# Altium PCB PCB1_邮票孔.PcbDoc
Units mil, origin at the board's own origin, x right, y up, seen from the top; angles counter-clockwise.
Board outline 1760.63 x 866.14 mil, 2 copper layers (Top Layer, Bottom Layer); 12 components, 8 nets, 39 pads, 36 vias.
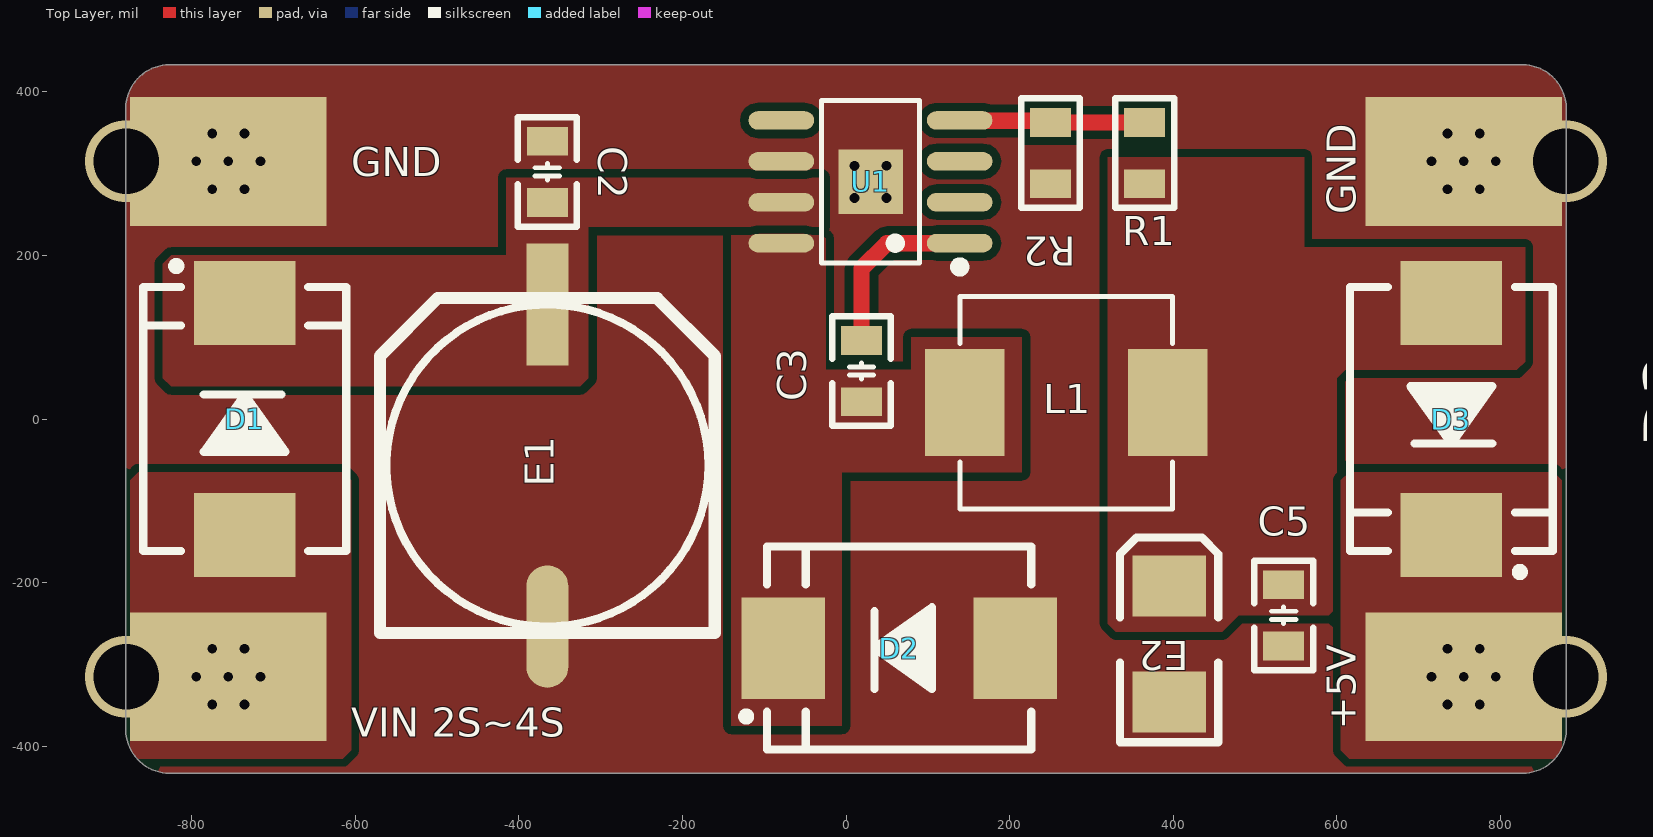
[diagram p0: Top Layer view]
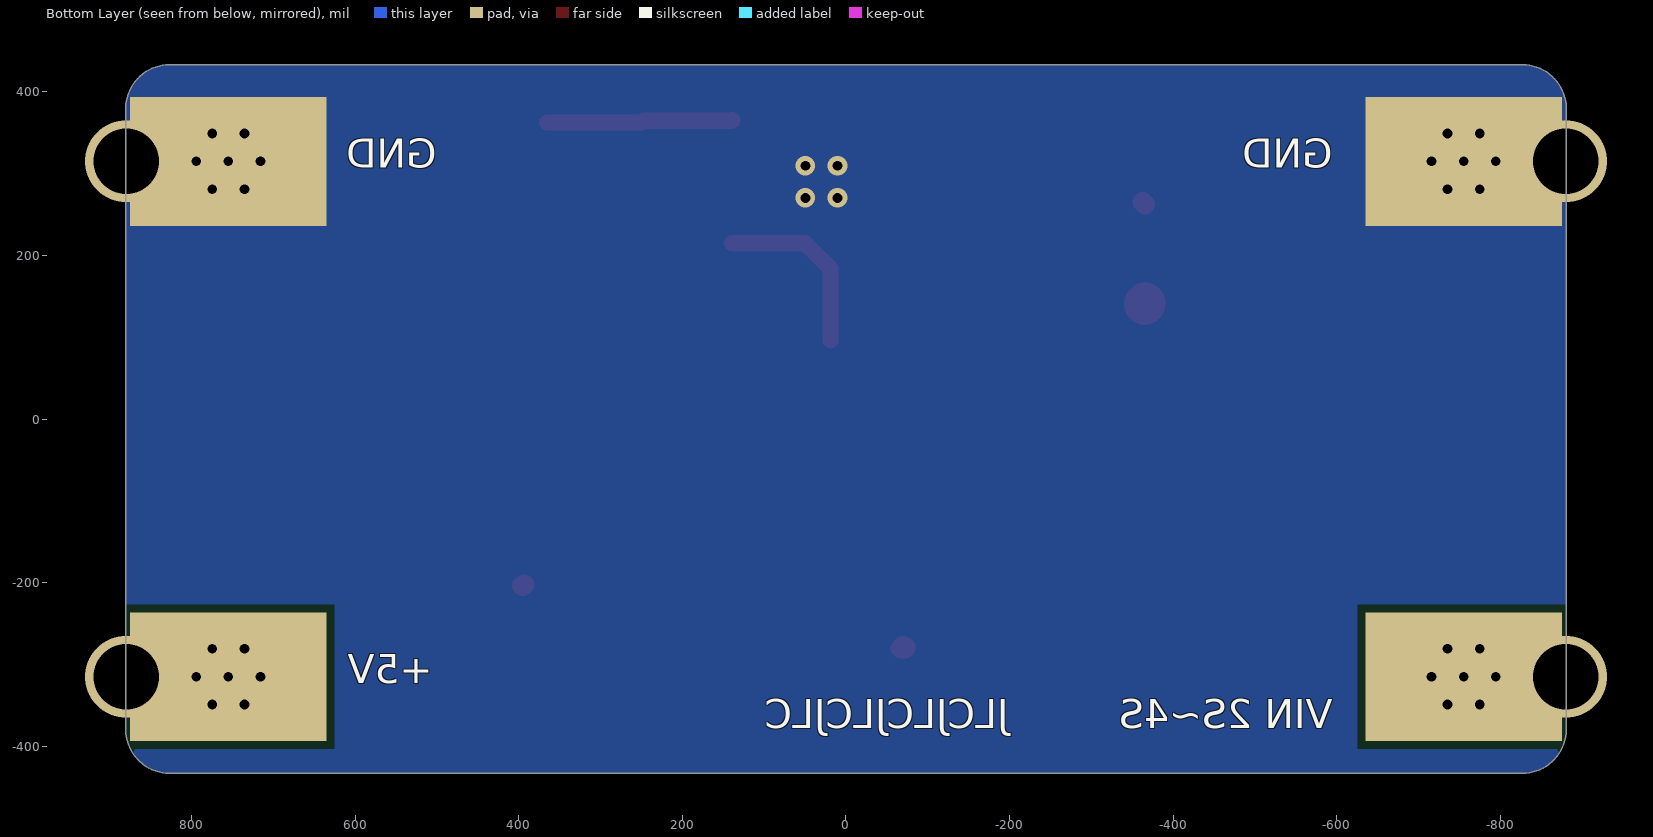
[diagram p1: Bottom Layer view, seen from below]
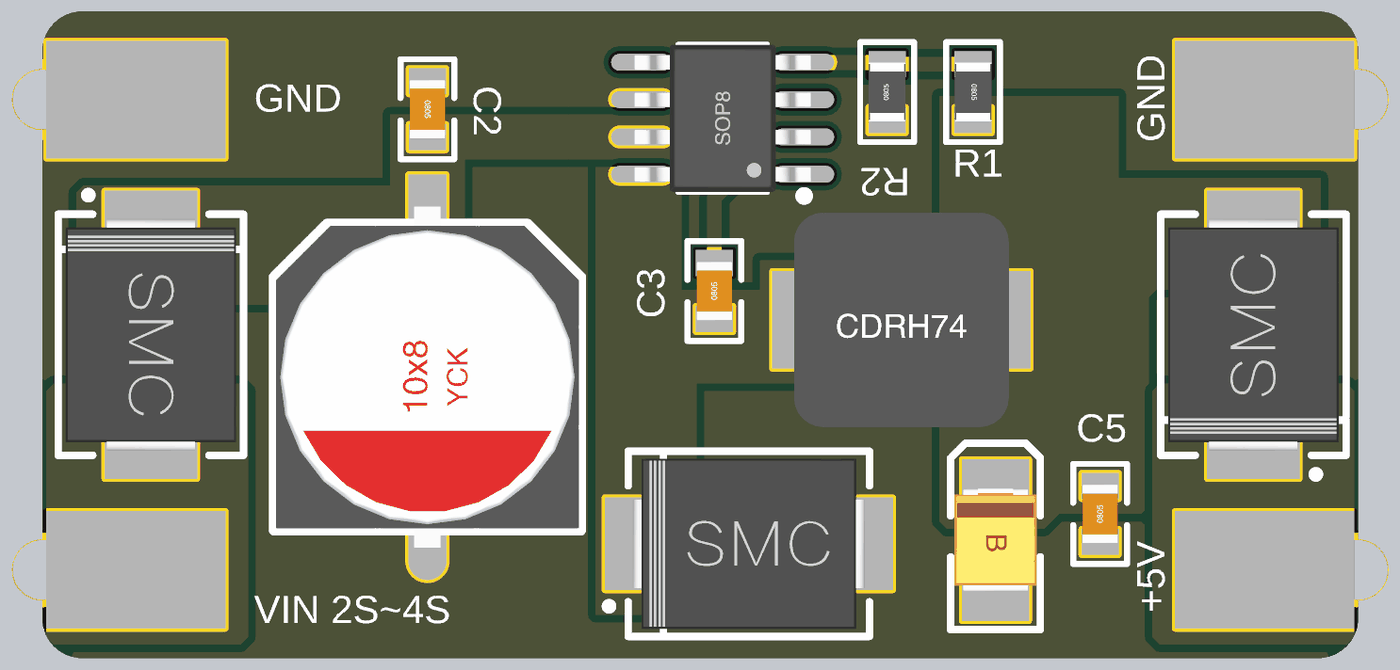
[diagram p2: 3D render of the assembled board from above, using the file's embedded part models]

## Layer stack, top to bottom
Top Solder: solder mask 0.4, Solder Resist, Dk 3.5
Top Layer: signal copper 1.4
Dielectric 1: dielectric 12.6, FR-4, Dk 4.8
Bottom Layer: signal copper 1.4
Bottom Solder: solder mask 0.4, Solder Resist, Dk 3.5

## Board outline
-880.32,-379.53 ccw(c-826.77,-379.53) -826.77,-433.07 826.77,-433.07 ccw(c826.77,-379.53) 880.31,-379.53 880.31,379.53 ccw(c826.77,379.53) 826.77,433.07 -826.77,433.07 ccw(c-826.77,379.53) -880.32,379.53

## Design rules (kind name [scope] priority, off if disabled: settings)
Clearance [All] p1: gap=10 ignorepadtopadclearanceinfootprint=FALSE except(0: Arc-Hole Track-Hole SMDPad-Hole THPad-Hole Via-Hole Fill-Hole Poly-Hole Region-Hole Text-Hole)
MinimumSolderMaskSliver [All] p1: minsoldermaskwidth=0
PolygonConnect [All] p1: connectstyle=Direct reliefconductorwidth=10 reliefentries=4 polygonreliefangle="90 Angle" airgapwidth=10
RoutingVias [All] p1: holewidth=28 width=50 viastyle="Through Hole" minholewidth=28 minwidth=50 maxholewidth=28 maxwidth=50
SilkToSilkClearance [All] p1: silktosilkclearance=0
SilkToSolderMaskClearance [IsPad] p1: minsilkscreentomaskgap=0 clearancetoexposedcopper=TRUE
SolderMaskExpansion [All] p1: expansion=4 istentingtop=FALSE
Width [All] p1: maxlimit=50 minlimit=10 preferedwidth=10
27 further rules are at their usual default settings.

## Components (designator, comment, footprint, x,y, rotation, side; value= is the part's Value field where it differs from the comment)
C2 "0.1uF" "C 0805_L" -365,302.14 r270 top
C3 "10nF" "C 0805_L" 18.95,58.64 r90 top
C5 "0.1uF" "C 0805_L" 535,-240 r90 top
D1 "SS34" SMC -735,0 r90 top
D2 "SS34" SMC 65,-280 r180 top
D3 "SS34" SMC 740,0 r270 top
E1 "10uF/10V" "CT 10*8 - R" -365,-56.85 r90 top
E2 "100uF/16V" "CD B(3528)" 395,-275 r270 top
L1 "22uH ±20% 3A 130mΩ" "22uH ±20% 3A 130mΩ" 269.13,20 r180 top
R1 "10k" "R 0805_L" 365,325 r270 top
R2 "3.24K" "R 0805_L" 250,325 r90 top
U1 "TPS5430" TPS5430 30,290 r90 top

## Footprints (in the part's own frame and the unit in brackets; to place one, negate y for a bottom-side part, rotate by r counter-clockwise, add the part's x,y. Pads: shape width x height; smd on the part's side, far side on the other; paste and mask are expansions set on the pad)
"22uH ±20% 3A 130mΩ" [mm]
  rect 2.474x3.32 smd: 1(3.153,0) 2(-3.153,0)
  silkscreen extent -3.3,-3.3 3.3,3.3, body extent -3.65,-3.65 3.65,3.65, height 4.5
"C 0805_L" [mil] "无极性贴片电容"
  rect 35x50 smd: 1(-37.4,0) 2(37.4,0)
  silkscreen extent -67,-36 67,36, body extent -39,-24 39,24, height 20
"CD B(3528)" [mil] "长3.5mm，宽2.8mm，厚1.9mm"
  rect 75x90 smd: 1(-70.87,-0.01) 2(70.86,-0.01)
  silkscreen extent -130,-60 120,60, body extent -69,-55 69,55, height 75
"CT 10*8 - R" [mm] "直径10mm，高8mm"
  rect 3.8x1.3 smd: 1(5,0)
  oval 3.8x1.3 smd: 2(-5,0)
  silkscreen extent -5.2,-5.2 5.2,5.2, body extent -5.8,-5.15 5.8,5.15, height 8
"R 0805_L" [mil] "1/8W贴片电阻"
  rect 35x50 smd: 1(-37.4,0) 2(37.4,0)
  silkscreen extent -67,-36 67,36, body extent -39,-25 39,25, height 20
SMC [mm] "7.1x5.9*2.3mm（长宽高，不包括引脚）"
  rect 2.6x3.15 smd: 1(-3.6,0) 2(3.6,0)
  silkscreen extent -4.1,-3.15 4.87,3.15, body extent -3.95,-2.9 3.95,2.9, height 2.45
TPS5430 [mm]
  oval 0.574x2.038 smd: 1(-1.905,-2.769) 2(-0.635,-2.769) 3(0.635,-2.769) 4(1.905,-2.769) 5(1.905,2.769) 6(0.635,2.769) 7(-0.635,2.769) 8(-1.905,2.769)
  rect 2x2 smd: 9(0,0)
  silkscreen extent -2.79,-2.92 2.53,1.52, body extent -2.5,-3 2.5,3, height 1.9

## Part data
C2 C3 C5: library part C, "无极性贴片电容", BOM名称=无极性贴片电容, 学习资源=www.ooocke.com, 版权归属=源创客
D1 D2 D3: "肖特基二极管", BOM名称=肖特基二极管, 学习资源=www.ooocke.com, 属性=40V/3A, 版权归属=源创客
E1: library part C-CT, "贴片固态电容", BOM名称=贴片固态电容, 学习资源=www.ooocke.com, 版权归属=源创客
E2: library part C-CD, "贴片钽电容", BOM名称=贴片钽电容, 学习资源=www.ooocke.com, 版权归属=源创客
L1: library part L-CD, "贴片功率电感", BOM名称=功率电感, 学习资源=www.ooocke.com, 版权归属=源创客
R1 R2: library part R, "贴片电阻", BOM名称=贴片电阻, 学习资源=www.ooocke.com, 版权归属=源创客
U1: "LC_C9864"

## Free pads (board coordinates)
  rect 240x157.48 smd: 25(-755,-314.96) 25(-755,314.96) 25(755,-314.96) 25(755,314.96)
  rect 240x157.48 smd far side: 25(-755,-314.96) 25(-755,314.96) 25(755,-314.96) 25(755,314.96)

## Via types
v1: diameter 23.62, hole 11.81, Top Layer to Bottom Layer, tented both sides, 28 vias
v2: diameter 100, hole 80, Top Layer to Bottom Layer, 4 vias
v3: diameter 24, hole 12, Top Layer to Bottom Layer, 4 vias

## Nets (pads, with @x,y where several pads share a name; then routed paths per layer and width w, separated by ;. In a path a pad name is that pad's centre, name@x,y a point inside that pad or via, vN(x,y) a via of type N, cw(c..) or ccw(c..) an arc to the next point about the centre after c; other vN are vias at no path point)
+5V: D3.2 pad.25@755,-314.96
  other v1: 735.31,-349.06 774.69,-349.06 715.63,-314.96 755,-314.96 794.37,-314.96 735.31,-280.87 774.69,-280.87
  other v2: 880,-315
GND: C2.1 C5.1 D2.1 E1.2 E2.2 pad.25@755,314.96 pad.25@-755,314.96 R2.1 U1.6 U1.9
  other v1: -774.69,280.87 -735.32,280.87 735.31,280.87 774.69,280.87 -794.37,314.96 -755,314.96 -715.63,314.96 715.63,314.96 755,314.96 794.37,314.96 -774.68,349.06 -735.31,349.06 735.31,349.06 774.69,349.06
  other v2: -880,315 880,315
  other v3: 10.32,270.32 49.69,270.32 10.32,309.69 49.69,309.69
NetC3_1: C3.1 D2.2 L1.1 U1.8 | length 5.7
  Top Layer w25: D2.2@-72.72,-279.02 -71.73,-280 D2.2@-69.33,-277.6 ; D2.2@-67.4,-279.33 D2.2@-66.73,-280
NetC3_2: C3.2 U1.1 | length 220.8
  Top Layer w20: C3.2 18.96,183.96 50,215 U1.1
NetC5_2: C5.2 D3.1 E2.1 L1.2 R1.2 | length 3.1
  Top Layer w25: E2.1@393.27,-202.4 E2.1 E2.1@395.49,-203.63
NetR1_1: R1.1 R2.2 U1.4 | length 227.1
  Top Layer w20: U1.4 139.51,364.5 247.9,364.5 R2.2 R1.1
VCC_2S-4S: D1.1 pad.25@-755,-314.96
  other v1: -774.69,-349.06 -735.32,-349.06 -794.37,-314.96 -755,-314.96 -715.63,-314.96 -774.68,-280.87 -735.31,-280.87
  other v2: -880,-315
VCC_IN: C2.2 D1.2 E1.1 U1.7 | length 5.4
  Top Layer w25: C2.2@-365,262.6 C2.2@-362.6,265
  Top Layer w50: E1.1@-365.59,141.73 -365,141.14 E1.1
pads on no net: U1.2 U1.3 U1.5

## Polygon pours and split planes (outlines as drawn)
GND on Top Layer "GND_L01_P021" (solid, pour order 21): -880.32,-379.53 ccw(c-826.77,-379.53) -826.77,-433.07 826.77,-433.07 ccw(c826.77,-379.53) 880.31,-379.53 880.31,379.53 ccw(c826.77,379.53) 826.77,433.07 -826.77,433.07 ccw(c-826.77,379.53) -880.32,379.53
NetC3_1 on Top Layer "NETC3_1" (solid, pour order 20): -140,240 -25,240 -25,60 80,60 80,100 215,100 215,-65 -5,-65 -5,-375 -140,-375
VCC_IN on Top Layer "VCC_IN_L01_P017" (solid, pour order 17): -415,235 -30,235 -30,295 -415,295
NetC5_2 on Top Layer "NETC5_2_L01_P015" (solid, pour order 15): 320,320 560,320 560,210 830,210 830,70 820,60 610,60 600,50 600,-230 590,-240 480,-240 460,-260 330,-260 320,-250 320,-220
VCC_IN on Top Layer "VCC_IN_L01_P008" (solid, pour order 8): -835,190 -825,200 -325,200 -315,190 -315,50 -325,40 -825,40 -835,50
VCC_IN on Top Layer "VCC_IN_L01_P007" (solid, pour order 7): -415,285 -405,295 -320,295 -315,290 -315,50 -325,40 -405,40 -415,50
+5V on Top Layer "+5V_L01_P001" (solid, pour order 1): 615,-415 605,-405 605,-75 615,-65 865,-65 875,-75 875,-405 865,-415
VCC_2S-4S on Top Layer "VCC_2S-4S_L01_P000" (solid, pour order 0): -615,-415 -605,-405 -605,-75 -615,-65 -865,-65 -875,-75 -875,-405 -865,-415
GND on Bottom Layer "GND_L02_P019" (solid, pour order 19): -880.32,-379.53 ccw(c-826.77,-379.53) -826.77,-433.07 826.77,-433.07 ccw(c826.77,-379.53) 880.31,-379.53 880.31,379.53 ccw(c826.77,379.53) 826.77,433.07 -826.77,433.07 ccw(c-826.77,379.53) -880.32,379.53

## Silkscreen, mask and mechanical layers (free items; w line width, h text height)
Top Overlay:
  text "GND" at -605,285 h60
  text "GND" at 635,250 h60 r90
  text "+5V" at 635,-380 h60 r90
  text "VIN 2S~4S" at -605,-400 h60
Bottom Overlay:
  text "GND" at -595,295.62 h60
  text "GND" at 500,295.62 h60
  text "+5V" at 505,-334.38 h60
  text "VIN 2S~4S" at -594.96,-389.38 h60
  text "JLCJLCJLCJLC" at -199.07,-389.38 h60
Mechanical 1:
  the board outline again, w10